# EAGLE board extruder-controller-ab (EAGLE 5.04)

Size 79.17 x 85.59 mm. Coordinates in mm from the lower left corner, seen from the top.
Outline: 0,0.13 79.05,0 79.17,85.46 0.13,85.59 0,0.13
Copper layers (1*16): Top 0.035mm / dielectric 1.5mm / Bottom 0.035mm
Design rules "reprap": minimum track width 8mil, minimum drill 20mil, track to track 10mil, track to pad 10mil, pad to pad 10mil, via to via 10mil, smd to smd 8mil, copper to edge 10mil, drill to drill 8mil, minimum pad ring 12mil, minimum via ring 10mil, stop-mask expansion 4mil, vias tented up to drill 25mil, thermal gap 10mil
Net classes: 0 default: width 0.305 mm; 1 power: width 1.27 mm; 2 motors: width 0.762 mm

## Footprints (pad centres in the part's own frame; a part is rotated, then mirrored left to right if it is on the bottom)
UD-10X10_NICHICON = smd 3.6 x 1.3: + 3.925,0; - -3.95,0
C1206 = smd 1.6 x 1.8: 1 -1.4,0; 2 1.4,0
C1206K = smd 1.5 x 2: 1 -1.5,0; 2 1.5,0
UD-6,3X5,8_NICHICON = smd 2.8 x 1: + 2.35,0; - -2.35,0
CHIPLED_1206 = smd 1.5 x 1.5: A 0,-1.75; C 0,1.75
3,0 = hole 3: 0,0
TO252 = smd 1 x 1.6: 1 -2.28,-4.8; 2 2.28,-4.8 | smd 5.4 x 6.2: 3 0,2.5
SO16W = smd 0.6 x 2.2: 1 -4.445,-4.6; 2 -3.175,-4.6; 3 -1.905,-4.6; 4 -0.635,-4.6; 5 0.635,-4.6; 6 1.905,-4.6; 7 3.175,-4.6; 8 4.445,-4.6; 9 4.445,4.6; 10 3.175,4.6; 11 1.905,4.6; 12 0.635,4.6; 13 -0.635,4.6; 14 -1.905,4.6; 15 -3.175,4.6; 16 -4.445,4.6
SO08 = smd 0.6 x 2.2: 1 -1.905,-2.6; 2 -0.635,-2.6; 3 0.635,-2.6; 4 1.905,-2.6; 5 1.905,2.6; 6 0.635,2.6; 7 -0.635,2.6; 8 -1.905,2.6
TQFP32-08 = smd 1.27 x 0.559: 1 -4.293,2.8; 2 -4.293,2; 3 -4.293,1.2; 4 -4.293,0.4; 5 -4.293,-0.4; 6 -4.293,-1.2; 7 -4.293,-2; 8 -4.293,-2.8; 17 4.293,-2.8; 18 4.293,-2; 19 4.293,-1.2; 20 4.293,-0.4; 21 4.293,0.4; 22 4.293,1.2; 23 4.293,2; 24 4.293,2.8 | smd 0.559 x 1.27: 9 -2.8,-4.293; 10 -2,-4.293; 11 -1.2,-4.293; 12 -0.4,-4.293; 13 0.4,-4.293; 14 1.2,-4.293; 15 2,-4.293; 16 2.8,-4.293; 25 2.8,4.293; 26 2,4.293; 27 1.2,4.293; 28 0.4,4.293; 29 -0.4,4.293; 30 -1.2,4.293; 31 -2,4.293; 32 -2.8,4.293
DIL14 = drill 0.813 long: 1 -7.62,-3.81; 2 -5.08,-3.81; 3 -2.54,-3.81; 4 0,-3.81; 5 2.54,-3.81; 6 5.08,-3.81; 7 7.62,-3.81; 8 7.62,3.81; 9 5.08,3.81; 10 2.54,3.81; 11 0,3.81; 12 -2.54,3.81; 13 -5.08,3.81; 14 -7.62,3.81
520426-4 = drill 0.889 round: 1 -4.445,6.35; 2 -3.175,8.89; 3 -1.905,6.35; 4 -0.635,8.89; 5 0.635,6.35; 6 1.905,8.89; 7 3.175,6.35; 8 4.445,8.89 | hole 3.251: -5.715,0; 5.715,0
1X03 = drill 1.016 long: 1 -2.54,0; 2 0,0; 3 2.54,0
1X04 = drill 1.016 long: 1 -3.81,0; 2 -1.27,0; 3 1.27,0; 4 3.81,0
1X06 = drill 1.016 long: 1 -6.35,0; 2 -3.81,0; 3 -1.27,0; 4 1.27,0; 5 3.81,0; 6 6.35,0
SOT223 = smd 1.219 x 2.235: 1 -2.311,-3.099; 2 0,-3.099; 3 2.311,-3.099 | smd 3.6 x 2.2: 4 0,3.099
HC49/S = drill 0.813 round: 1 -2.413,0; 2 2.413,0
R1206 = smd 1.6 x 1.803: 1 -1.422,0; 2 1.422,0
M1206 = smd 1.6 x 2: 1 -1.4,0; 2 1.4,0
B25P = drill 0.813 octagon: A -2.54,0; E 2.54,0; S 0,2.54
B3F-10XX = drill 1.016 long: 1 -3.251,2.261; 2 3.251,2.261; 3 -3.251,-2.261; 4 3.251,-2.261
SJ = smd 1.168 x 1.6: 1 -0.762,0; 2 0.762,0
ML6 = drill 0.914 octagon: 1 -2.54,-1.27; 2 -2.54,1.27; 3 0,-1.27; 4 0,1.27; 5 2.54,-1.27; 6 2.54,1.27
ML10 = drill 0.914 octagon: 1 -5.08,-1.27; 2 -5.08,1.27; 3 -2.54,-1.27; 4 -2.54,1.27; 5 0,-1.27; 6 0,1.27; 7 2.54,-1.27; 8 2.54,1.27; 9 5.08,-1.27; 10 5.08,1.27
MSTBV6 = drill 1.397 long: 1 -12.7,0; 2 -7.62,0; 3 -2.54,0; 4 2.54,0; 5 7.62,0; 6 12.7,0
MSTBV2 = drill 1.397 long: 1 -2.54,0; 2 2.54,0
MSTBV4 = drill 1.397 long: 1 -7.62,0; 2 -2.54,0; 3 2.54,0; 4 7.62,0
GND-GNDA = smd 1.27 x 1.27: GND -1.27,0; GNDA 1.27,0

## Placement (x,y rotation side)
C1  100uF  [UD-10X10_NICHICON]  64.22,72.13 180 top
C2  100uF  [UD-10X10_NICHICON]  73.11,49.91 180 top
C3  100nF  [C1206]  56.73,67.94 90 top
C4  100nF  [C1206]  64.73,56.64 0 top
C5  .22uF  [C1206K]  55.46,50.41 270 top
C6  100nF  [C1206K]  60.29,50.16 180 top
C7  100nF  [C1206K]  64.1,50.41 270 top
C8  10uF  [UD-6,3X5,8_NICHICON]  15.58,56.51 90 top
C9  .22uF  [C1206K]  55.21,32 270 top
C10  100nF  [C1206K]  60.16,31.62 180 top
C11  100nF  [C1206K]  64.1,32 270 top
C12  16pf  [C1206]  34.51,17.27 180 top
C13  16pf  [C1206]  48.73,18.03 0 top
C14  100nF  [C1206]  37.3,57.65 270 top
C15  100nF  [C1206]  11.01,38.35 180 top
DEBUG  [CHIPLED_1206]  12.92,33.52 0 top
H1  MOUNT-HOLE3.0  [3,0]  3.9,3.93 0 top
H2  MOUNT-HOLE3.0  [3,0]  4.15,81.4 0 top
H3  MOUNT-HOLE3.0  [3,0]  75.15,4.06 0 top
H4  MOUNT-HOLE3.0  [3,0]  75.27,81.4 90 top
IC1  7805DT  [TO252]  63.72,62.1 270 top
IC2  A3949  [SO16W]  59.65,23.24 0 top
IC3  A3949  [SO16W]  59.65,41.65 0 top
IC4  SN75176ASOIC  [SO08]  49.62,67.81 270 top
IC5  ATMEGA168  [TQFP32-08]  40.48,30.86 90 top
IC6  [DIL14]  3.01,-0.64 0 top
J1  [520426-4]  49.49,82.42 180 top
JP1  [1X03]  25.62,56.51 270 top
JP2  [1X03]  52.41,58.8 180 top
JP3  [1X03]  52.41,54.99 180 top
JP4  [1X04]  20.79,49.27 270 top
JP5  [1X06]  5.3,44.7 270 top
JP6  [1X03]  33.74,56.51 270 top
JP7  [1X03]  29.68,56.51 270 top
JP8  [1X04]  49.49,79.24 0 top
LED1  2  [CHIPLED_1206]  -12.23,-3.18 0 top  (outside the outline)
LED2  1  [CHIPLED_1206]  52.16,28.32 0 top
LED3  2  [CHIPLED_1206]  52.16,40.51 0 top
LED4  [CHIPLED_1206]  49.49,28.32 0 top
LED5  [CHIPLED_1206]  16.85,71.5 0 top
LED6  [CHIPLED_1206]  28.16,71.62 0 top
LED7  [CHIPLED_1206]  39.33,71.5 0 top
LED8  [CHIPLED_1206]  49.49,40.51 0 top
POWER  [CHIPLED_1206]  4.15,71.24 270 top
Q1  NIF5002  [SOT223]  23.33,69.46 0 top
Q2  NIF5002  [SOT223]  34.51,69.46 0 top
Q3  NIF5002  [SOT223]  11.39,69.46 0 top
Q4  16MHZ  [HC49/S]  37.05,21.08 180 top
R1  180  [R1206]  61.05,81.02 90 top
R2  4.7k  [R1206]  27.01,26.16 180 top
R3  4.7k  [R1206]  26.63,42.54 90 top
R4  10K  [R1206]  66.64,19.81 270 top
R5  10K  [R1206]  66.64,38.22 270 top
R6  4.7K  [M1206]  20.54,57.65 270 top
R7  10K  [R1206]  3.9,23.87 0 top
R8  1K  [R1206]  12.92,27.55 270 top
R9  1K  [R1206]  11.01,43.43 0 top
R10  1K  [R1206]  11.01,40.89 0 top
R11  1K  [R1206]  52.29,34.16 90 top
R12  1K  [R1206]  52.16,46.1 90 top
R13  1K  [R1206]  49.49,34.16 270 top
R14  1K  [R1206]  49.49,46.1 270 top
R15  1K  [R1206]  3.9,74.54 0 top
R16  10k  [B25P]  -4.61,12.06 0 top
R17  330  [R1206]  -10.96,-10.8 0 top  (outside the outline)
R20  4.7K  [R1206]  16.34,48.64 180 top
R21  4.7K  [R1206]  16.34,45.97 180 top
R29  1K  [R1206]  28.28,66.16 270 top
R30  1K  [R1206]  39.46,66.42 270 top
R31  1K  [M1206]  16.85,66.16 270 top
S1  [B3F-10XX]  7.33,30.73 90 top
SJ2  [SJ]  -10.96,-22.23 0 top  (outside the outline)
SV1  [ML6]  20.54,35.3 90 top
SV2  [ML10]  18.88,19.68 0 top
X1  MSTBV6  [MSTBV6]  24.47,79.12 180 top
X3  MSTBV2  [MSTBV2]  7.46,58.8 270 top
X4  MSTBV4  [MSTBV4]  73.75,32.63 90 top
~NUDEV~1  GND-GNDA  [GND-GNDA]  30.31,22.22 90 top

## Library data of the parts
C1-C11 C14 R6 R11-R14 R20 R21 R29-R31 = rcl
C12 C13 C15 R1-R5 R7-R10 R15 R17 = resistor
DEBUG LED1-LED8 POWER = led
H1-H4 = holes
IC1 = linear
IC2-IC4 = reprap
IC5 = SparkFun
IC6 = analog-devices
J1 = con-amp
JP1-JP8 = pinhead
Q1-Q3 = transistor-power
Q4 = crystal
R16 = pot
S1 = switch-omron
SJ2 = jumper
SV1 SV2 = con-harting-ml
X1 X3 X4 = con-phoenix-508
~NUDEV~1 = supply1

## Nets
+12V [power]: C1.+ C3.1 C7.2 C11.2 IC1.1 IC2.9 IC3.9 J1.3 J1.4 J1.5 JP8.1 R15.2 R29.2 R30.2 R31.2 X1.2 X1.4 X1.6
A0: IC5.23 JP1.3 R16.S
A1: IC5.24 Q3.1
A2: IC4.3 IC5.25 R3.1
A3: C8.+ IC5.26 IC6.8 IC6.9 R6.1 SJ2.2
A6: IC5.19 JP6.3
A7: IC5.22 JP7.3
D2: IC5.32 SV2.8
D3: IC5.1 SV2.7
D4: IC4.2 IC5.2 R2.1
D5: IC2.6 IC5.9 LED2.A
D6: IC3.6 IC5.10 LED3.A
D7: IC2.3 IC5.11 LED4.A
D8: IC3.3 IC5.12 LED8.A
D9: IC5.13 JP3.3
D10: IC5.14 JP2.3
D11: IC5.15 Q1.1 SV1.4
D12: IC5.16 Q2.1 SV1.1
D13: IC5.17 R8.2 SV1.3
GND [power]: C1.- C2.- C3.2 C4.2 C5.1 C8.- C9.1 C12.1 C13.1 C14.1 DEBUG.C IC1.3 IC2.2 IC2.4 IC2.8 IC2.13 IC3.2 IC3.4 IC3.8 IC3.13 IC4.5 IC6.1 IC6.4 IC6.7 IC6.13 J1.6 J1.7 J1.8 JP1.1 JP2.1 JP3.1 JP4.2 JP5.1 JP5.2 JP6.1 JP7.1 JP8.4 POWER.C Q1.3 Q2.3 Q3.3 R3.2 R11.2 R12.2 R13.1 R14.1 R16.A S1.3 S1.4 SV1.6 SV2.9 X3.2 ~NUDEV~1.GND
GNDA: IC5.3 IC5.5 IC5.21 ~NUDEV~1.GNDA
N$1: IC4.7 J1.1 JP8.2 R1.2
N$2: IC4.6 J1.2 JP8.3 R1.1
N$3: C9.2 IC2.15
N$4 [motors]: IC2.7 X4.1
N$5 [motors]: IC2.10 X4.2
N$6: C10.2 IC2.12
N$7: C10.1 IC2.11
N$8: DEBUG.A R8.1
N$9: C11.1 IC2.14
N$10 [motors]: IC3.7 X4.3
N$11: C5.2 IC3.15
N$12: IC2.5 R4.2
N$13: C6.2 IC3.12
N$14: C6.1 IC3.11
N$15: C7.1 IC3.14
N$16: IC3.5 R5.2
N$17 [motors]: IC3.10 X4.4
N$18: LED2.C R11.1
N$19: LED3.C R12.1
N$20: C14.2 IC5.20
N$21: JP5.5 R10.1
N$22: JP5.4 R9.1
N$23: LED4.C R13.2
N$24: LED8.C R14.2
N$25: POWER.A R15.1
N$26: IC6.14 SJ2.1 X3.1
N$28: LED1.A R17.1
N$30: IC6.12 LED1.C
N$31: C12.2 IC5.7 Q4.2
N$32: C13.2 IC5.8 Q4.1
N$33 [power]: LED7.C Q2.2 Q2.4 X1.1
N$34 [power]: LED6.C Q1.2 Q1.4 X1.3
N$35 [power]: LED5.C Q3.2 Q3.4 X1.5
N$41: LED5.A R31.1
N$42: LED6.A R29.1
N$43: LED7.A R30.1
RESET: C15.1 IC5.29 R7.1 S1.1 S1.2 SV1.5
RTS#: C15.2 JP5.6
RX: IC4.1 IC5.30 R9.2
SCL: IC5.28 JP4.4 R21.1
SDA: IC5.27 JP4.3 R20.1
TX: IC4.4 IC5.31 R10.2
VCC: C2.+ C4.1 IC1.2 IC4.8 IC5.4 IC5.6 IC5.18 IC6.11 JP1.2 JP2.2 JP3.2 JP4.1 JP5.3 JP6.2 JP7.2 R2.2 R4.1 R5.1 R6.2 R7.2 R16.E R17.2 R20.2 R21.2 SV1.2 SV2.10

## Tracks (layer width: path | path; a pad name or v marks a point on that pad's centre or on a via)
+12V  (17 unrouted)
A0  (2 unrouted)
A1  (1 unrouted)
A2  (2 unrouted)
A3  (5 unrouted)
A6  (1 unrouted)
A7  (1 unrouted)
D2  (1 unrouted)
D3  (1 unrouted)
D4  (2 unrouted)
D5  (2 unrouted)
D6  (2 unrouted)
D7  (2 unrouted)
D8  (2 unrouted)
D9  (1 unrouted)
D10  (1 unrouted)
D11  (2 unrouted)
D12  (2 unrouted)
D13  (2 unrouted)
GND  (52 unrouted)
GNDA  (3 unrouted)
N$1  (3 unrouted)
N$2  (3 unrouted)
N$3  (1 unrouted)
N$4  (1 unrouted)
N$5  (1 unrouted)
N$6  (1 unrouted)
N$7  (1 unrouted)
N$8  (1 unrouted)
N$9  (1 unrouted)
N$10  (1 unrouted)
N$11  (1 unrouted)
N$12  (1 unrouted)
N$13  (1 unrouted)
N$14  (1 unrouted)
N$15  (1 unrouted)
N$16  (1 unrouted)
N$17  (1 unrouted)
N$18  (1 unrouted)
N$19  (1 unrouted)
N$20  (1 unrouted)
N$21  (1 unrouted)
N$22  (1 unrouted)
N$23  (1 unrouted)
N$24  (1 unrouted)
N$25  (1 unrouted)
N$26  (2 unrouted)
N$28  (1 unrouted)
N$30  (1 unrouted)
N$31  (2 unrouted)
N$32  (2 unrouted)
N$33  (3 unrouted)
N$34  (3 unrouted)
N$35  (3 unrouted)
N$41  (1 unrouted)
N$42  (1 unrouted)
N$43  (1 unrouted)
RESET  (5 unrouted)
RTS#  (1 unrouted)
RX  (2 unrouted)
SCL  (2 unrouted)
SDA  (2 unrouted)
TX  (2 unrouted)
VCC  (25 unrouted)

## Text on the board
tPlace: A+ | A- | B+ | B- | C+ | C- | RS485 | + | POWER | THERMISTOR | NOT ETHERNET! | A0 | A7 | A6 | Its RS485 | + | - | - | - | - | D10 | + | - | - | + | + | + | D9 | - | Serial | + | Extruder Controller | BLK | GND | make.rrrf.org/ec-2.2 | BRN | CTS# | c RRRF.org 2009 | License: GPL v3.0 | RED | VCC | ORG | V2.2 | TXD | YEL | RXD | ICSP | 2B | GRN | RTS# | 2A | 1B | RESET | 1A | Design By: ZachHoeken.com | QUADRATURE